# Altium PCB PCB1.PcbDoc
Units mm, origin at the board's own origin, x right, y up, seen from the top; angles counter-clockwise.
Board outline 65.7 x 45.52 mm, 2 copper layers (Top Layer, Bottom Layer), stack 1.671 mm thick; 10 components, 5 nets, 51 pads, 0 vias.
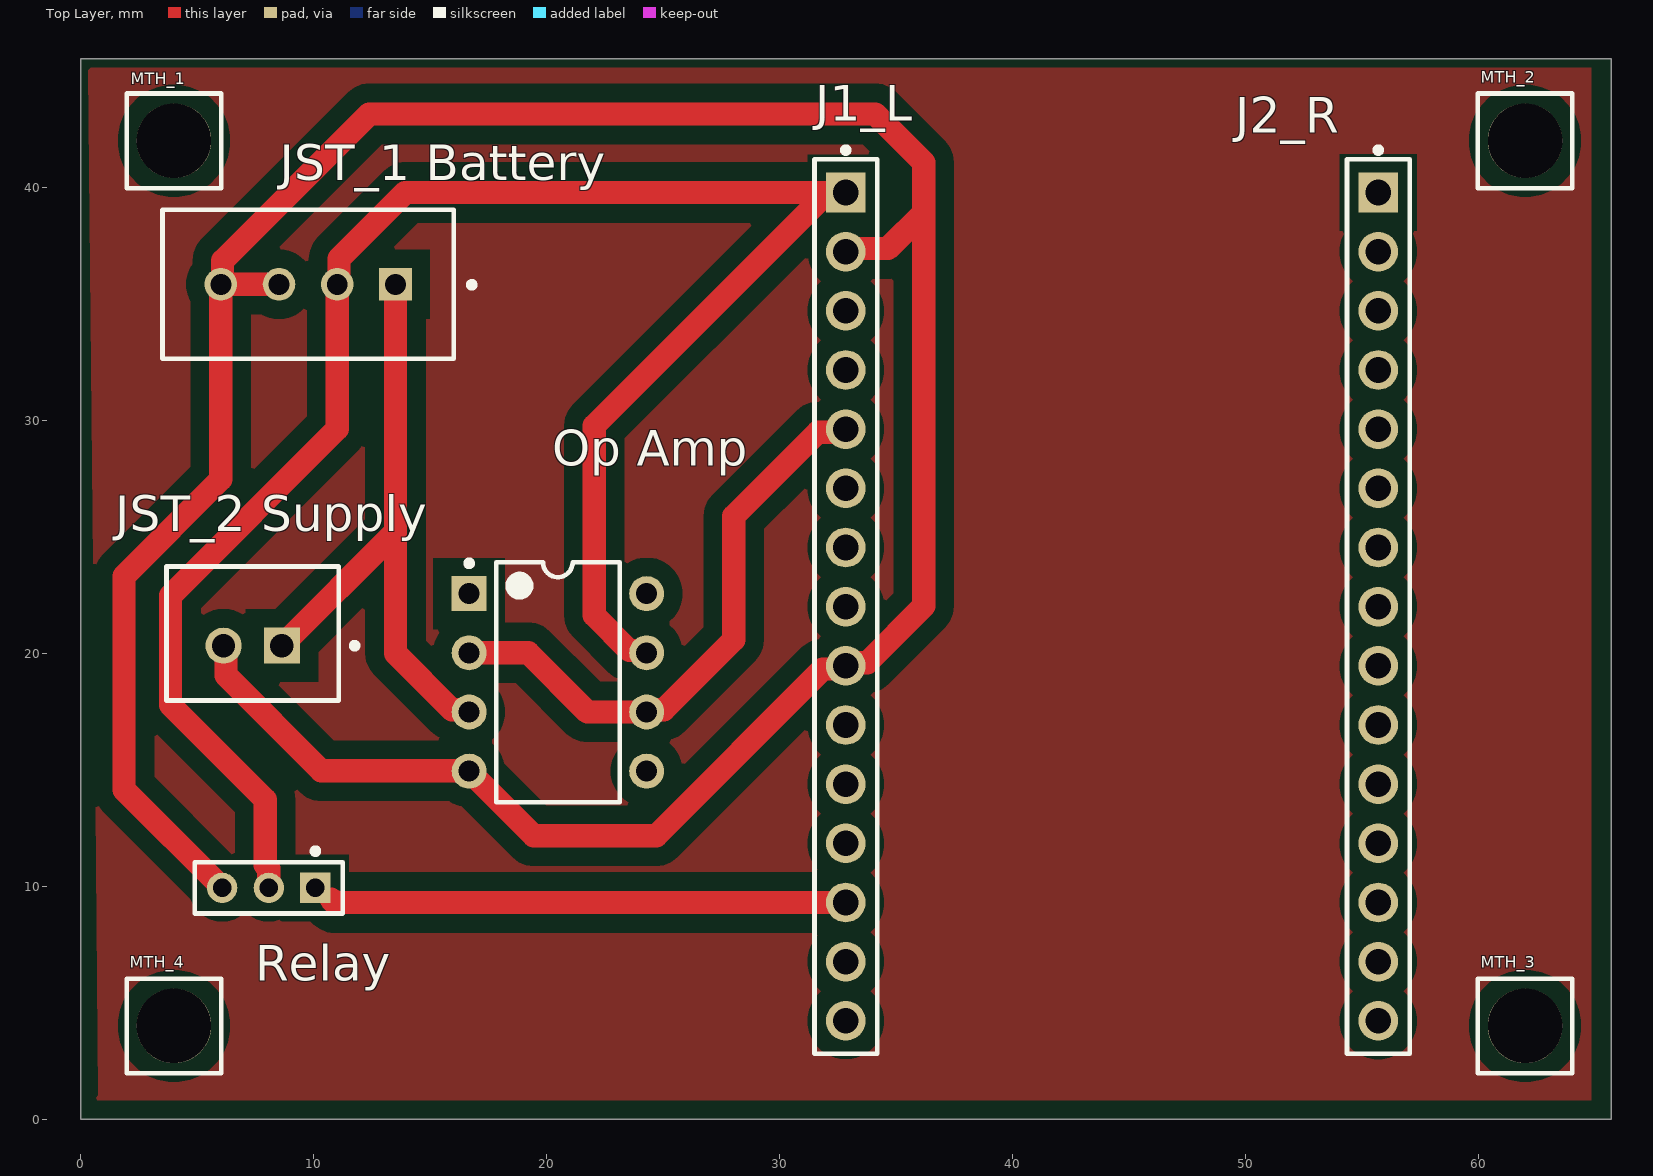
[diagram p0: Top Layer view]
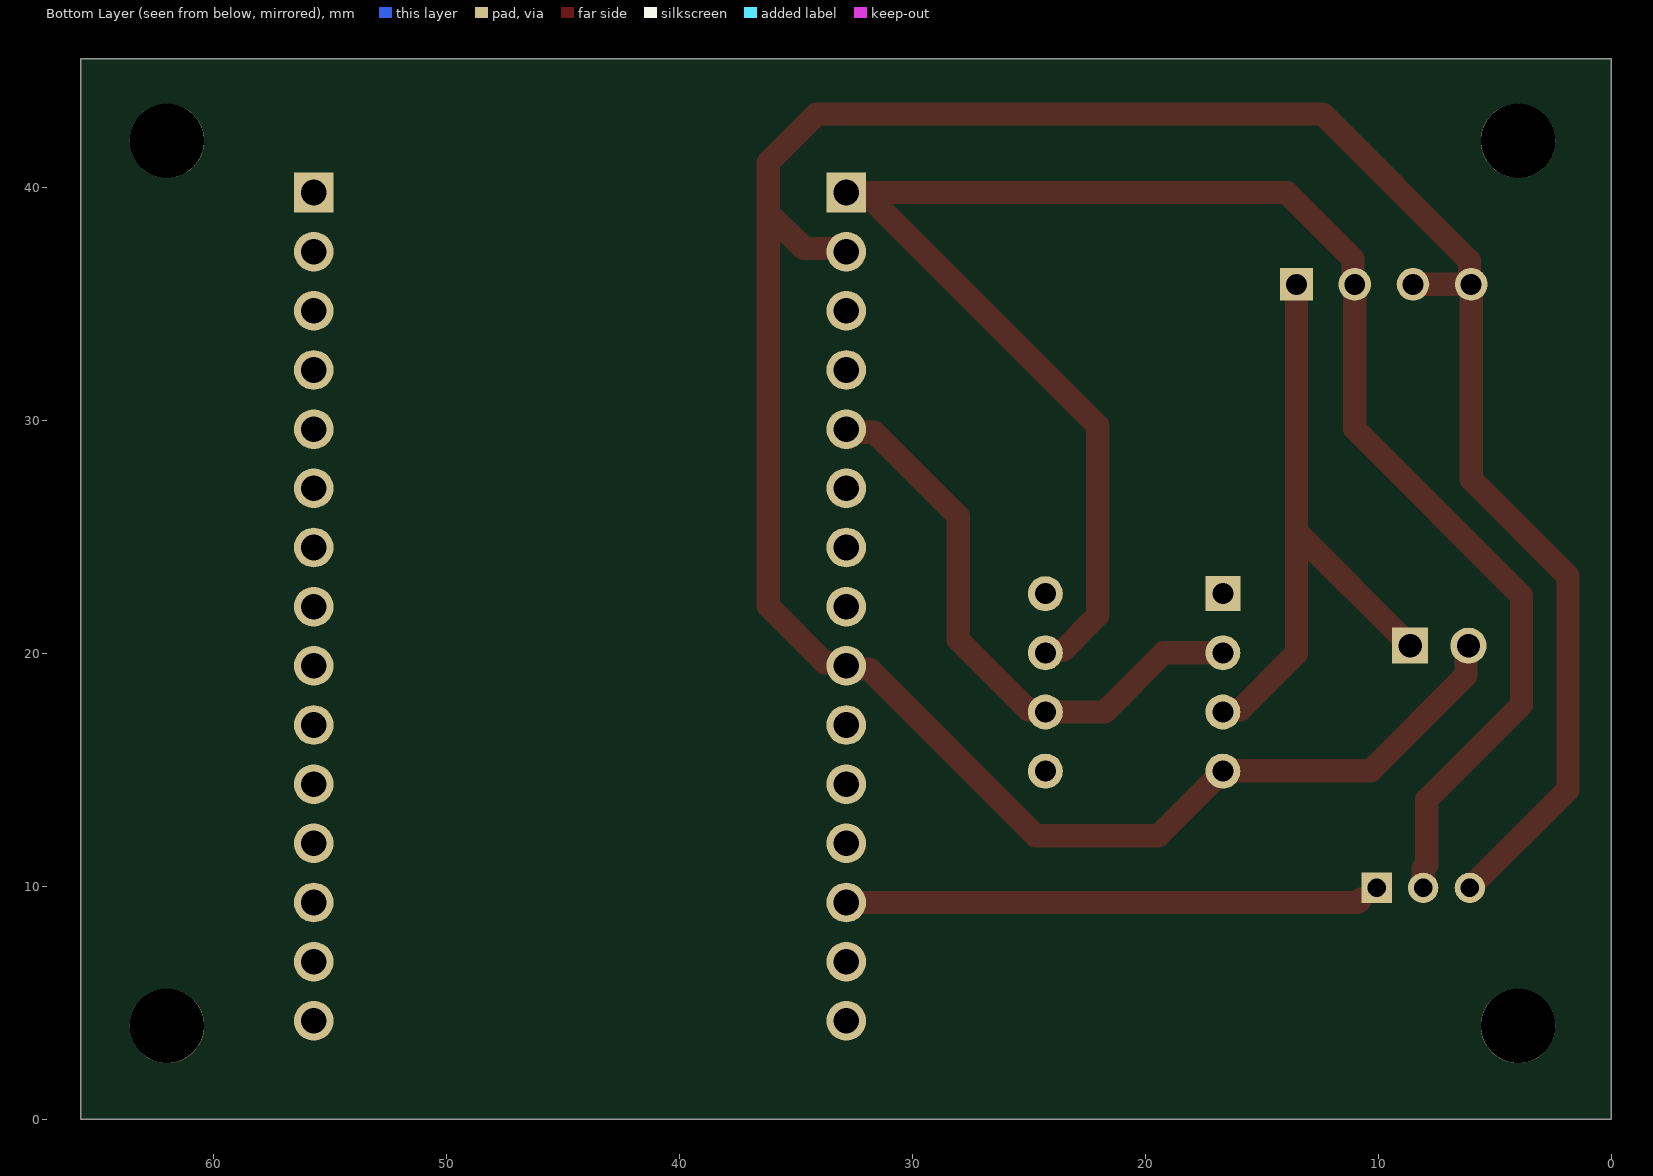
[diagram p1: Bottom Layer view, seen from below]
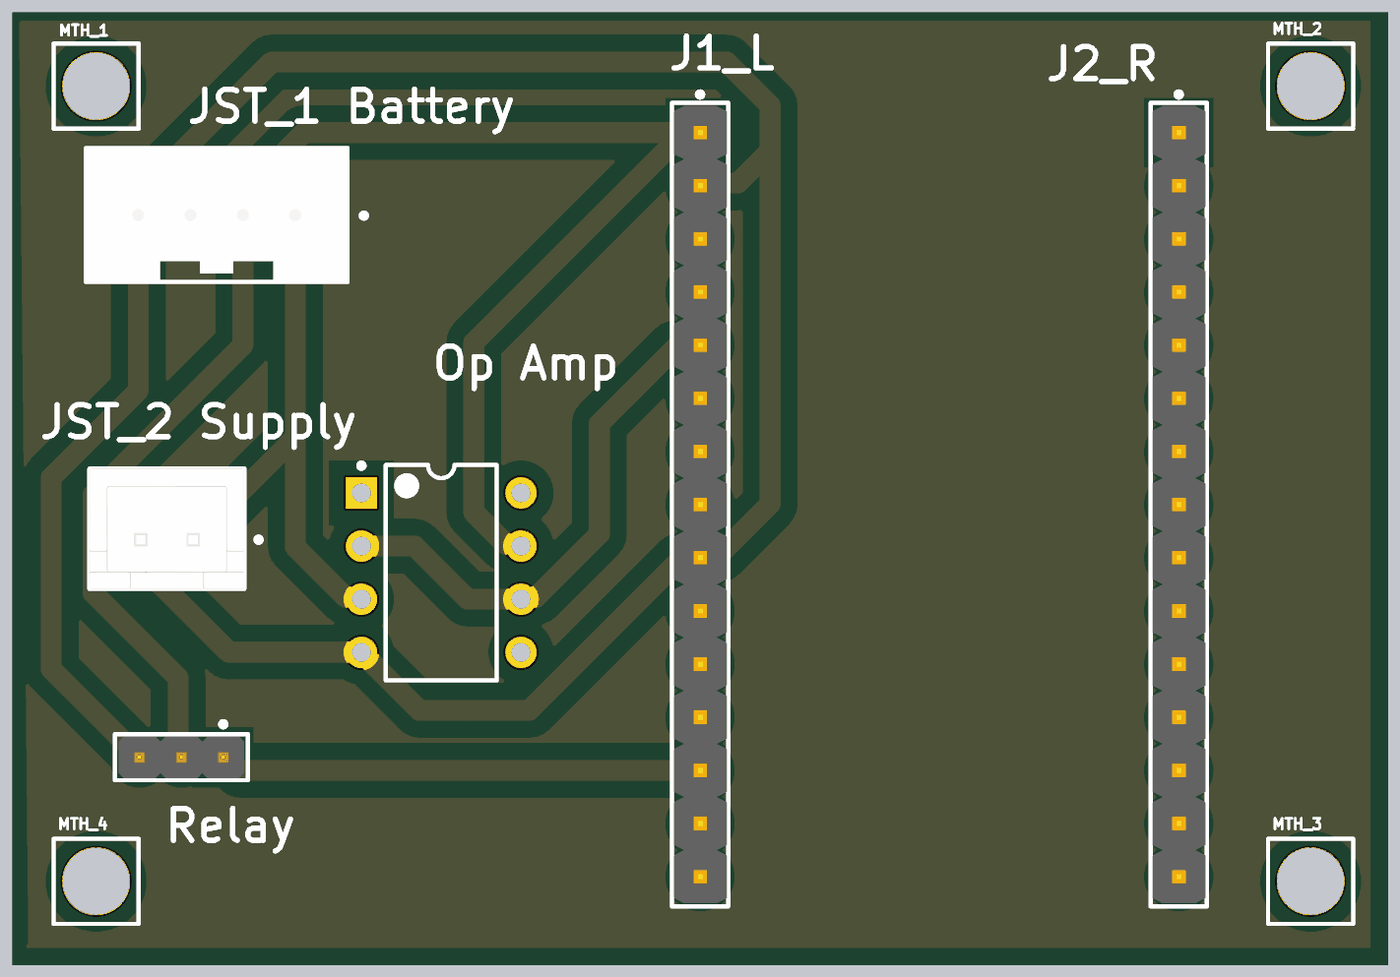
[diagram p2: 3D render of the assembled board from above, using the file's embedded part models]

## Layer stack, top to bottom
Top Solder: solder mask 0.0102, Solder Resist, Dk 3.5
Top Layer: signal copper 0.0356
Dielectric 1: dielectric 1.6, FR-4, Dk 4.8
Bottom Layer: signal copper 0.0356
Bottom Solder: solder mask 0.0102, Solder Resist, Dk 3.5

## Board outline
65.7,45.52 0,45.52 0,0 65.7,0

## Design rules (kind name [scope] priority, off if disabled: settings)
Clearance [All] p1: gap=0.8 ignorepadtopadclearanceinfootprint=FALSE
PolygonConnect [All] p1: connectstyle=Relief reliefconductorwidth=0.254 reliefentries=4 polygonreliefangle="90 Angle" airgapwidth=0.254
RoomDefinition Sheet1 [InComponentClass('Sheet1')] p1: confinementstyle=ConfineIn formatcopy=TRUE lockcomponents=FALSE outline -104.3,-40 -53.5,-40 -53.5,-14.6 -104.3,-14.6
RoutingVias [All] p1: holewidth=0.8 width=1 viastyle="Through Hole" minholewidth=0.8 minwidth=1 maxholewidth=0.8 maxwidth=1
SolderMaskExpansion [All] p1: expansion=0.102 istentingtop=FALSE
Width [All] p1: maxlimit=1.2 minlimit=1 preferedwidth=1.2 minimp=50.000000 maximp=50.000000 favimp=50.000000
30 further rules are at their usual default settings.

## Components (designator, comment, footprint, x,y, rotation, side; value= is the part's Value field where it differs from the comment)
J1_L "Node MCU L" FP-61301511121-MFG 32.84,22 r270 top
J2_R "Node MCU R" FP-61301511121-MFG 55.7,22 r270 top
"JST_1 Battery" "B04B-XASK-1(LF)(SN)" FP-B04B-XASK-1_LF_SN-MFG 9.76,35.84 r0 top
"JST_2 Supply" "B2B-XH-A(LF)(SN)" FP-B2B-XH-A_LF_SN-MFG 7.38,20.85 r180 top
"Op Amp" "LM741J" NAB0008A 20.48,18.75 r0 top
Relay "M22-2010305" FP-M22-2010305-MFG 8.07,9.93 r180 top
? "Comment" MTH3P2MM 4,4 r0 top
? "Comment" MTH3P2MM 62,4 r0 top
? "Comment" MTH3P2MM 62,42 r0 top
? "Comment" MTH3P2MM 4,42 r0 top

## Footprints (in the part's own frame and the unit in brackets; to place one, negate y for a bottom-side part, rotate by r counter-clockwise, add the part's x,y. Pads: shape width x height; smd on the part's side, far side on the other; paste and mask are expansions set on the pad)
FP-61301511121-MFG [mm]
  rect 1.7x1.7 hole 1.1 paste-1000 mask+0: 1(-17.78,0)
  round 1.7 hole 1.1 paste-1000 mask+0: 2(-15.24,0) 3(-12.7,0) 4(-10.16,0) 5(-7.62,0) 6(-5.08,0) 7(-2.54,0) 8(0,0) 9(2.54,0) 10(5.08,0) 11(7.62,0) 12(10.16,0) 13(12.7,0) 14(15.24,0) 15(17.78,0)
  silkscreen extent -19.72,-1.35 19.2,1.35, body extent -19.3,-1.45 19.3,1.45, height 0.25
FP-B2B-XH-A_LF_SN-MFG [mm]
  rect 1.55x1.55 hole 1 paste-1000 mask+0: 1(-1.25,0.525)
  round 1.55 hole 1 paste-1000 mask+0: 2(1.25,0.525)
  silkscreen extent -4.5,-2.88 3.7,2.88, body extent -3.8,-2.98 3.8,2.98, height 0.25
FP-B04B-XASK-1_LF_SN-MFG [mm]
  rect 1.4x1.4 hole 0.9 paste-1000 mask+0: 1(3.75,0)
  round 1.4 hole 0.9 paste-1000 mask+0: 2(1.25,0) 3(-1.25,0) 4(-3.75,0)
  silkscreen extent -6.25,-3.2 7.15,3.2, body extent -6.35,-3.3 6.35,3.3, height 0.25
FP-M22-2010305-MFG [mm]
  rect 1.3x1.3 hole 0.8 paste-1000 mask+0: 1(-2,0)
  round 1.3 hole 0.8 paste-1000 mask+0: 2(0,0) 3(2,0)
  silkscreen extent -3.17,-1.7 3.17,1.1, body extent -3.27,-1.2 3.27,1.2, height 0.25
MTH3P2MM [mm]
  round 3.2 hole 3.2: 48(0,0)
  silkscreen extent -2.03,-2.03 2.03,2.03
NAB0008A [mm] "DIP, 8-Leads, Body 9.78x6.73mm, Pitch 2.54mm, Row Spacing 7.62mm"
  rect 1.5x1.5 hole 0.9: 1(-3.81,3.81)
  round 1.5 hole 0.9: 2(-3.81,1.27) 3(-3.81,-1.27) 4(-3.81,-3.81) 5(3.81,-3.81) 6(3.81,-1.27) 7(3.81,1.27) 8(3.81,3.81)
  silkscreen extent -3.93,-5.15 2.65,5.23, body extent -3.6,-5.15 3.6,5.15, height 5.08

## Part data
J1_L: library part CMP-207987-000006-1, "CONN HEADER VERT 15POS 2.54MM", Color=Black, Flammability Rating="UL94 V-0", Max Operating Temperature=105°C, Min Operating Temperature=-40°C, Voltage Rating=250V, Connector Type=Header, Contact Finish - Mating=GOLD, Contact Material="Copper Alloy", Contact Mating Length=0.236inch, Contact Plating=Gold, Contact Shape=Square, Contact Type="Male Pin", Fastening Type=Pull, Gender=Male, Insulation Color=Black, Insulation Material=Nylon, Mount="Through Hole", Number of Contacts=15, Number of Positions=15, Number of Rows=1, Packaging=Bulk, Pitch=0.1inch, RoHS Compliant=Yes, Series=WR-PHD, Termination=Solder
J2_R: library part CMP-207987-000006-1, "ESP8266", Color=Black, Flammability Rating="UL94 V-0", Max Operating Temperature=105°C, Min Operating Temperature=-40°C, Voltage Rating=250V, Connector Type=Header, Contact Finish - Mating=GOLD, Contact Material="Copper Alloy", Contact Mating Length=0.236inch, Contact Plating=Gold, Contact Shape=Square, Contact Type="Male Pin", Fastening Type=Pull, Gender=Male, Insulation Color=Black, Insulation Material=Nylon, Mount="Through Hole", Number of Contacts=15, Number of Positions=15, Number of Rows=1, Packaging=Bulk, Pitch=0.1inch, RoHS Compliant=Yes, Series=WR-PHD, Termination=Solder
"JST_1 Battery": library part CMP-17439-000018-1, "CONN HEADER VERT 4POS 2.5MM", Current Rating=3A, Manufacturer=JST, Temperature="-25°C to +85°C", Temperature Range High=+85°C, Temperature Range Low=-25°C, Voltage Rating=250V, Automotive=No, Category=Conn, ComponentLink2Description=Datasheet, ComponentLink2URL=http://www.jst-mfg.com/product/pdf/eng/eXA1.pdf, Conn Gender=Male, Conn Orientation=Straight, Contact Material=Tin,Copper, Device Class L1=Connectors, Device Class L2="Headers and Wire Housings", Device Class L3=unset, Digikey Description="CONN HEADER VERT 4POS 2.5MM", Height=8.8mm, Lead Free=Yes, Manufacturer Part Number=B04B-XASK-1(LF)(SN), Number of Contacts=4, Number of Rows=1, Octopart=https://octopart.com/b04b-xask-1%28lf%29%28sn%29-jst-3990149, Package=B04B-XASK-1(LF)(SN), Pitch=2.5mm, RoHS=TRUE
"JST_2 Supply": library part CMP-2000-05888-3, "CONN HEADER VERT 2POS 2.5MM", Color=Natural, Contact Resistance=20mR, Current Rating=3A, Housing Color=White, Insulation Resistance=1GR, Max Operating Temperature=85°C, Max Voltage Rating (AC)=250V, Min Operating Temperature=-25°C, Connector Type="Male Pin", Contact Material=Brass, Contact Plating=Tin, Contact Type="Male Pin", Depth=5.75mm, Fastening Type=Detent, Housing Material=Polyamide, Lead Free="Lead Free", Lead Pitch=2.5mm, Length=7.4mm, Max Current Rating=3A, Max Voltage Rating (DC)=250V, Mount="Through Hole", Number of Contacts=2, Number of Positions=2, Number of Rows=1, Orientation=Straight, Packaging=Bulk, Pitch=2.5mm, REACH SVHC="No SVHC", Series=XH, Termination=Solder, Voltage Rating=250V, Voltage Rating (AC)=250V, Wire/Cable Gauge=22AWG
"Op Amp": library part CMP-0055-00160-3, "Operational Amplifier, 8-pin CerDIP", Manufacturer="Texas Instruments", Package Reference=NAB0008A, PackageTopMarking=NSUZXYTT*LM741J, PowerWise=N, ComponentLink1Description="Datasheet URL", ComponentLink1URL=http://www.ti.com/general/docs/lit/getliterature.tsp?genericPartNumber=LM741&fileType=pdf, CompType=Amplifiers, PackageDescription="Cerdip, .400 x .310in Body, 8 Lead, .300in Centers, .100in Pitch", PinCount=8, RoHS=N
Relay: library part CMP-15831-000100-1, "CONN HEADER VERT 3POS 2MM", Case/Package=SIL, Color=Black, Contact Resistance=20mR, Current Rating=1A, Flammability Rating="UL94 V-0", Insulation Resistance=10GR, Max Operating Temperature=105°C, Min Operating Temperature=-55°C, Package Quantity=1000, Voltage Rating=650V, Voltage Rating (AC)=250V, Connector Type="Male Pin", Contact Finish - Mating=GOLD, Contact Material=Bronze, Contact Mating Length=0.138inch, Contact Plating=Gold, Contact Shape=Square, Contact Type="Male Pin", Depth=2mm, Fastening Type=Pull, Housing Color=Black, Housing Material=Nylon, Insulation Color=Black, Insulation Material=Nylon, Lead Pitch=2mm, Length=6mm, Mated Stacking Heights=8.6mm, Max Current Rating=1A, Mount="Through Hole", Number of Contacts=3, Number of Positions=3, Number of Rows=1, Orientation=Straight, Packaging=Bulk, Pitch=2mm, Radiation Hardening=No, Reach SVHC Compliant=Yes, RoHS Compliant=Yes, Series=M22, Termination=Solder, Working Voltage=250V

## Nets (pads, with @x,y where several pads share a name; then routed paths per layer and width w, separated by ;. In a path a pad name is that pad's centre, name@x,y a point inside that pad or via, vN(x,y) a via of type N, cw(c..) or ccw(c..) an arc to the next point about the centre after c; other vN are vias at no path point)
+5: "JST_1 Battery.2" "Op Amp.7" J1_L.1 Relay.2 | length 79.5
  Top Layer w1: Relay.2 8.07,10.758 7.92,10.908 7.92,13.71 3.855,17.775 3.855,22.482 11.01,29.637 11.01,35.84 11.087,35.917 11.087,36.938 13.929,39.78 J1_L.1 ; 24.29,20.02 24.194,20.116 23.552,20.116 22.04,21.628 22.04,29.763 31.767,39.49
GND: "JST_1 Battery.3" "JST_1 Battery.4" "JST_2 Supply.2" "Op Amp.4" J1_L.2 J1_L.9 Relay.3 | length 127.9
  Top Layer w1: Relay.3 1.855,14.145 1.855,23.31 6.01,27.465 6.01,35.84 ; 6.07,20.385 6.13,20.325 6.235,20.22 6.235,19.048 10.324,14.96 16.65,14.96 16.67,14.94 19.44,12.17 24.702,12.17 31.858,19.326 32.706,19.326 J1_L.9 32.974,19.594 33.757,19.594 36.19,22.027 36.19,38.91 ; 8.51,35.84 6.01,35.84 ; J1_L.2 32.974,37.374 34.654,37.374 36.19,38.91 ; 6.01,35.84 6.087,35.917 6.087,36.856 12.38,43.15 34.11,43.15 36.19,41.07 36.19,38.91
NetJ1_L_5: "Op Amp.2" "Op Amp.6" J1_L.5 | length 25.4
  Top Layer w1: 16.67,20.02 19.21,20.02 21.75,17.48 24.29,17.48 24.386,17.576 25.028,17.576 28.033,20.581 28.033,25.885 31.634,29.486 32.706,29.486 J1_L.5
NetJ1_L_13: J1_L.13 Relay.1 | length 22.3
  Top Layer w1: 10.74,9.45 10.89,9.3 J1_L.13
  Bottom Layer w0.381: J1_L.13@32.74,9.94 J1_L.13@32.84,9.84
"NetJST_1 Battery_1": "JST_1 Battery.1" "JST_2 Supply.1" "Op Amp.3" | length 26.9
  Top Layer w1: 8.63,20.325 13.51,25.205 ; 13.51,35.84 13.51,25.205 ; 16.67,17.48 16.574,17.576 15.932,17.576 13.51,19.998 13.51,25.205
pads on no net: "Op Amp.1" "Op Amp.5" "Op Amp.8" ?.48 J1_L.3 J1_L.4 J1_L.6 J1_L.7 J1_L.8 J1_L.10 J1_L.11 J1_L.12 J1_L.14 J1_L.15 J2_R.1 J2_R.2 J2_R.3 J2_R.4 J2_R.5 J2_R.6 J2_R.7 J2_R.8 J2_R.9 J2_R.10 J2_R.11 J2_R.12 J2_R.13 J2_R.14 J2_R.15

## Polygon pours and split planes (outlines as drawn)
no net on Top Layer "NONET_L-01_P-001" (solid, pour order 1): 0.32,45.06 0.39,45.13 64.85,45.13 64.85,0.81 0.54,0.81 0.76,1.03

## Silkscreen, mask and mechanical layers (free items; w line width, h text height)
Mechanical 2:
  lines w0.5: 65.39,45.4 0.08,45.4 0.08,0.29 65.24,0.29 65.39,0.44 65.39,45.4 ; 65.39,45.4 65.39,45.4

## Text inside footprints (layer, text, board x,y; h text height)
?: Top Overlay "MTH_1" at 2.147,44.422 h0.51
?: Top Overlay "MTH_2" at 60.095,44.498 h0.51
?: Top Overlay "MTH_3" at 60.095,6.498 h0.51
?: Top Overlay "MTH_4" at 2.095,6.498 h0.51